# Altium PCB miaow-foc-board.pcbdoc (part 5 of 10)
Units mil, origin at the board's own origin, x right, y up, seen from the top; angles counter-clockwise.
Board outline 2755.91 x 3149.61 mil, 6 copper layers (SIG1, GND2, SIG3, PWR4, GND5, SIG6), stack 60.566 mil thick; 437 components, 392 nets, 2120 pads, 1697 vias.
Unrouted connection lines stored in the file: 1090.
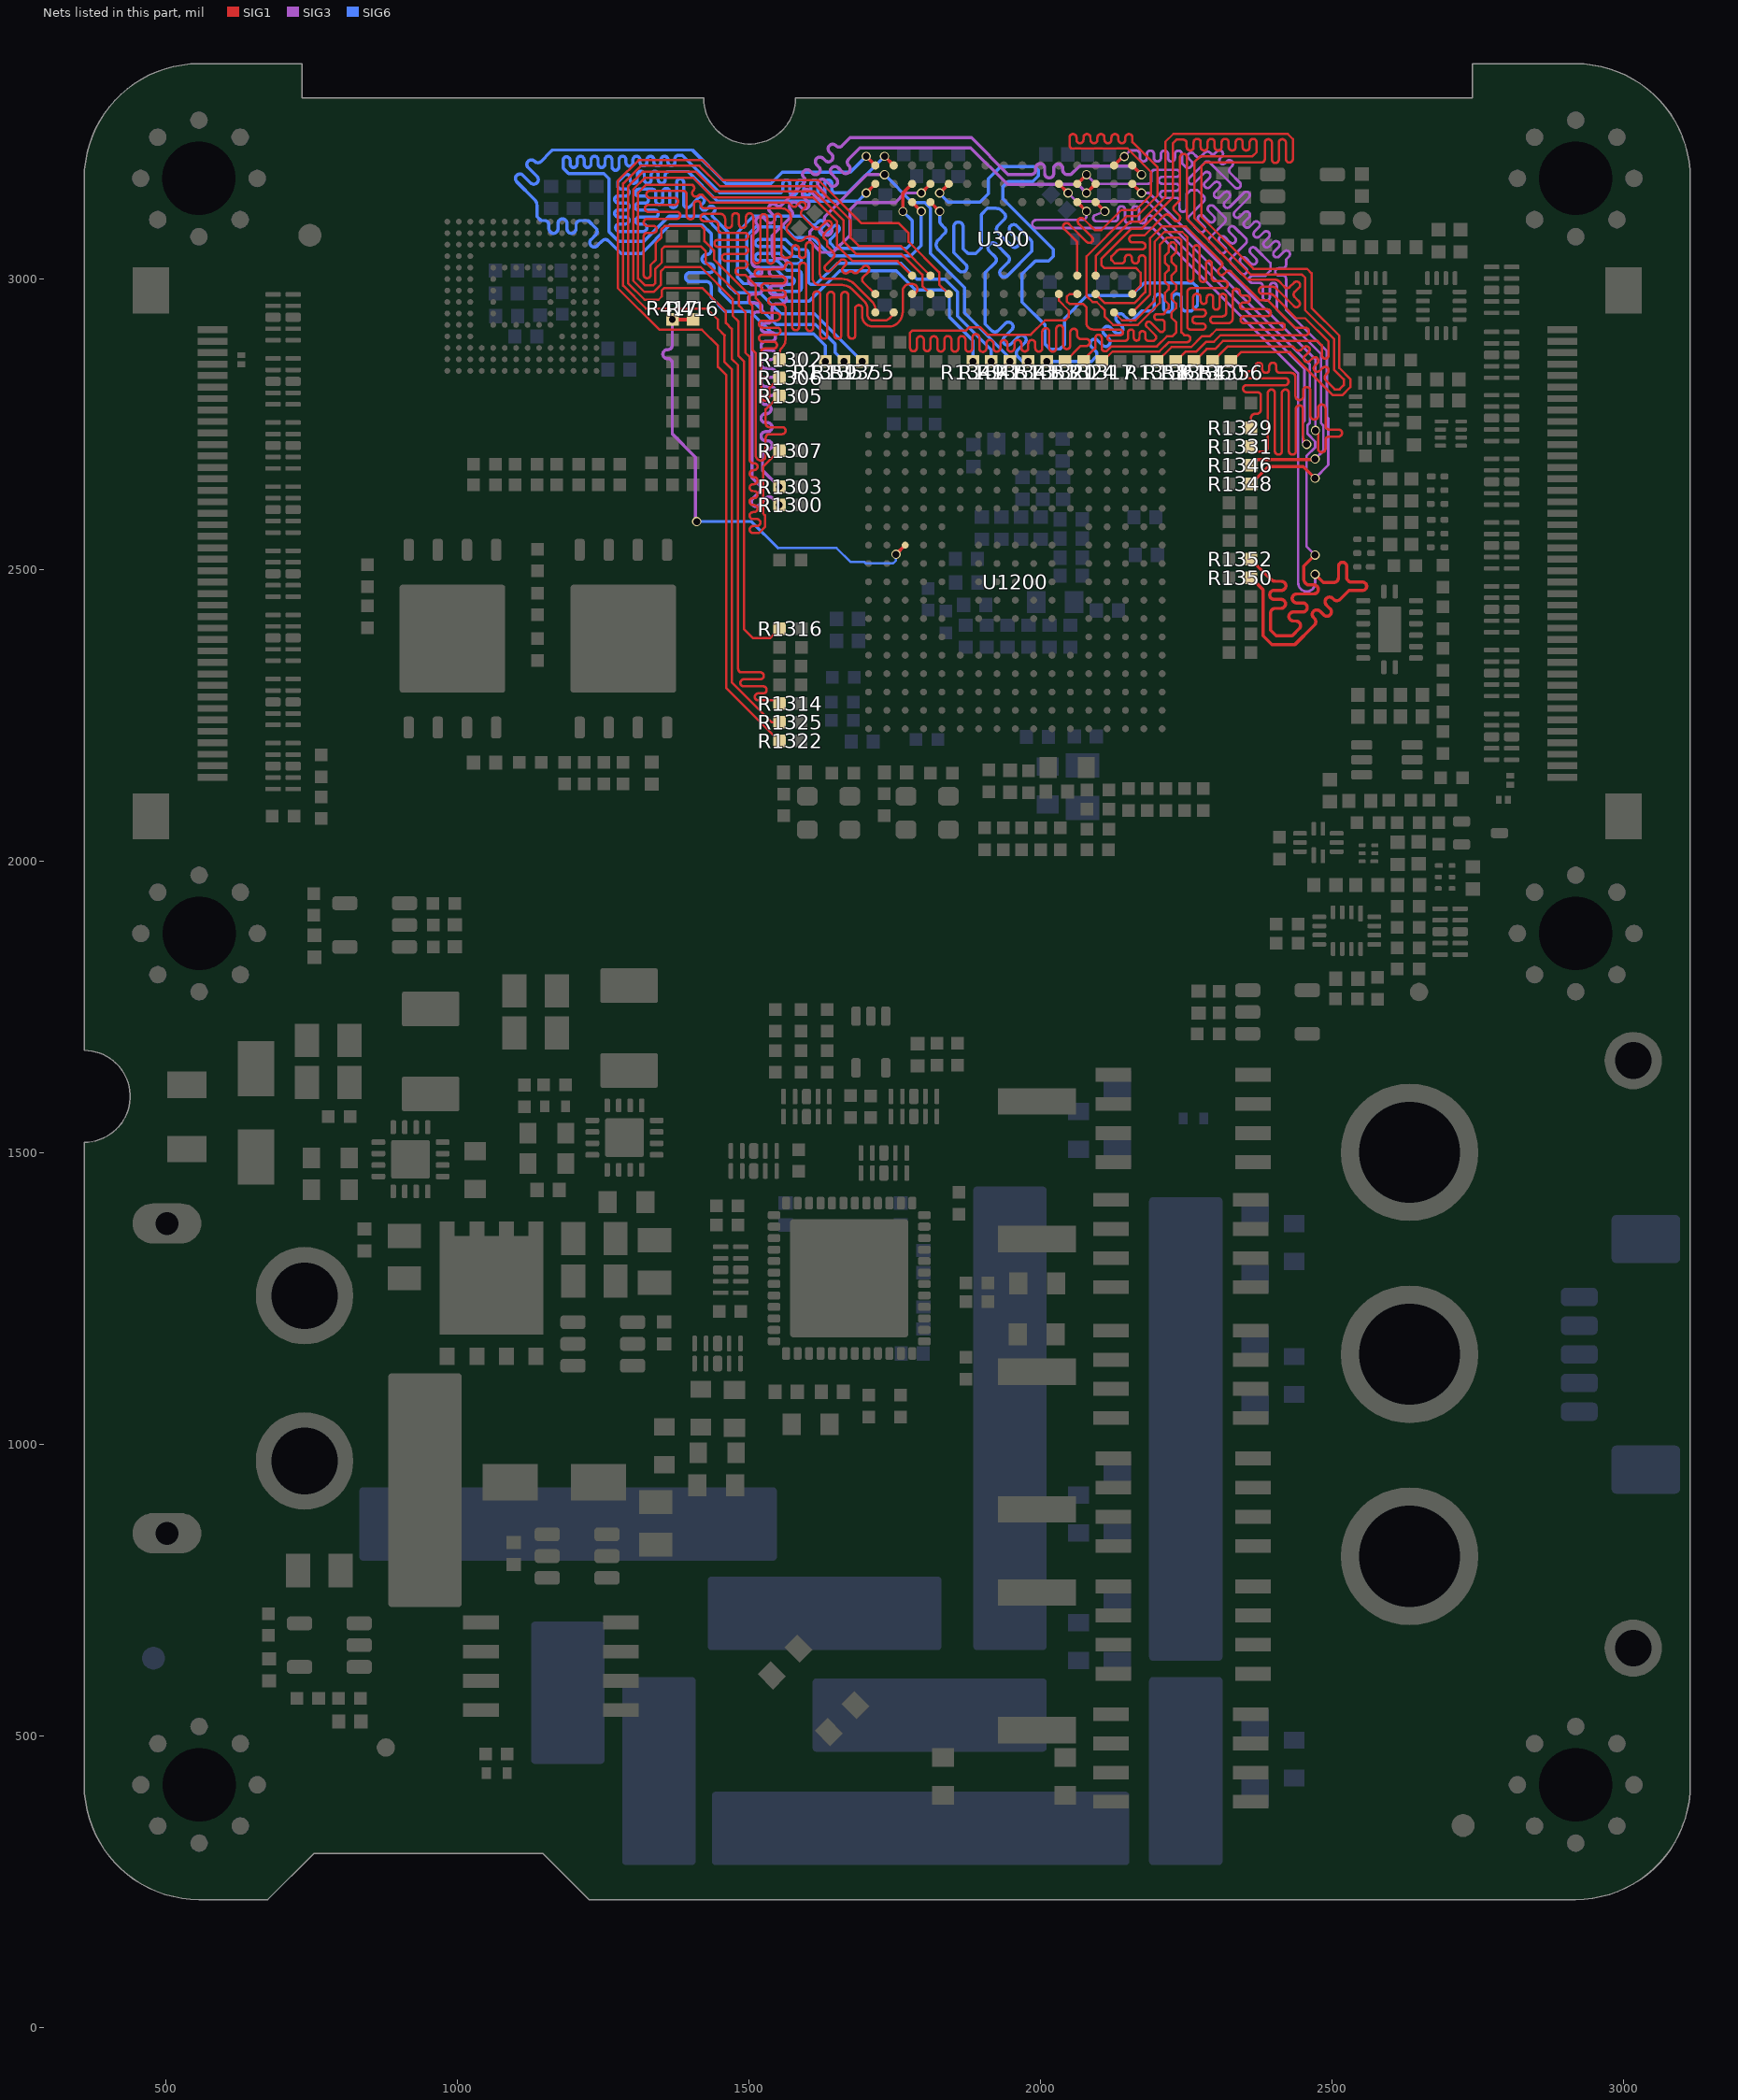
[diagram p8: the nets of this part, all layers, seen from the top]

## Via types
v1: diameter 17.72, hole 11.81, SIG1 to SIG6, tented both sides, 1223 vias
v2: diameter 15.75, hole 11.81, SIG1 to SIG6, tented both sides, 453 vias
v3: diameter 17.72, hole 11.81, SIG1 to SIG6, tented top, 21 vias

## Nets (pads, with @x,y where several pads share a name; then routed paths per layer and width w, separated by ;. In a path a pad name is that pad's centre, name@x,y a point inside that pad or via, vN(x,y) a via of type N, cw(c..) or ccw(c..) an arc to the next point about the centre after c; other vN are vias at no path point) (continued)
CMD: R416.2 R417.1 U1200.C11 | length 825.6
  SIG1 w6: v1(1368.5,2929.83) R416.2@1404.29,2929.83 ; v2(1752.34,2527.07) U1200.C11@1768.08,2542.81
  SIG3 w5.5: v1@1368.5,2929.64 1368.5,2916.66 1368.5,2886.07 cw(c1360.75,2886.07) 1360.75,2878.32 1360.03,2878.32 ccw(c1360.03,2870.57) 1360.03,2862.82 1360.75,2862.82 cw(c1360.75,2855.07) 1368.5,2855.07 1368.5,2852.32 1368.5,2733.73 1408.45,2693.77 1408.45,2585.05 v2(1410.34,2583.17)
  SIG6 w4: 1549.59,2538.13 1650.05,2538.13 1674.54,2513.64 1698.1,2513.64 1700.5,2511.24 1747.13,2511.24 1752.34,2516.45 v2(1752.34,2527.07)
  SIG6 w5: v2(1410.34,2583.17) 1504.55,2583.17 1549.59,2538.13
D0: R1329.2 U300.R8 | length 1320.9
  SIG1 w4: R1329.2@2361.46,2743.94 2361.46,2761.41 cw(c2368.1,2761.41) 2368.1,2768.06 2371.24,2768.06 ccw(c2371.24,2775.32) 2378.49,2775.32 2378.49,2799.18 ccw(c2372.49,2799.18) 2372.49,2805.18 2353.71,2805.18 cw(c2353.71,2811.18) 2353.71,2817.18 2420,2817.18 ccw(c2420,2823.18) 2420,2829.18 2358.32,2829.18 cw(c2358.32,2835.18) 2358.32,2841.18 2364.38,2841.18 ccw(c2364.38,2845.64) 2368.85,2845.64 2368.85,2849.88 cw(c2374.85,2849.88) 2380.85,2849.88 2380.85,2844.32 ccw(c2386.85,2844.32) 2392.85,2844.32 2392.85,2849.88 cw(c2398.85,2849.88) 2404.85,2849.88 2404.85,2844.32 ccw(c2410.85,2844.32) 2410.47,2838.33 ; 2410.48,2838.4 2430.01,2838.4 cw(c2430.01,2830.57) 2437.84,2830.57 2437.84,2798.4 ccw(c2444.53,2798.4) 2451.19,2797.77 2451.19,2809.35 cw(c2457.19,2808.12) 2463.31,2808.13 2463.31,2764.88 ccw(c2469.96,2764.88) 2476.62,2764.66 2476.62,2778.04 cw(c2482.92,2777.81) 2489.22,2777.83 2489.22,2747.09 ccw(c2495.22,2747.09) 2495.22,2741.09 2511.6,2741.09 cw(c2511.6,2735.09) 2511.6,2729.09 2495.22,2729.09 ccw(c2495.22,2723.09) 2489.22,2723.09 2489.22,2708.25 cw(c2482.92,2708.27) 2476.62,2708.04 2476.62,2734.92 v2(2472.03,2739.51)
  SIG1 w6: U300.R8@2157.85,3162.69 v2(2173.6,3146.94)
  SIG3 w4.5: v2(2173.6,3146.94) 2186.65,3146.94 2472.03,2861.56 2472.03,2743.32 2470.12,2741.41 v2(2472.03,2739.51)
D1: R1331.2 U300.N7 | length 1417.2
  SIG1 w4: R1331.2@2361.46,2711.82 2370.29,2702.99 2382.8,2702.99 ccw(c2382.8,2710.69) 2390.5,2710.69 2390.5,2803.68 cw(c2396.5,2803.68) 2402.5,2803.68 2402.5,2704.06 ccw(c2408.5,2704.06) 2414.5,2704.06 2414.5,2803.68 cw(c2420.5,2803.68) 2426.5,2803.68 2426.5,2704.06 ccw(c2432.5,2704.06) 2438.5,2704.06 2438.5,2776.68 cw(c2444.5,2776.68) 2450.5,2776.68 2450.5,2731.45 ccw(c2472.61,2731.45) v2(2456.98,2715.82)
  SIG1 w6: U300.N7@2094.86,3131.19 v2(2110.6,3115.44)
  SIG3 w4.5: v2(2110.6,3115.44) 2093.48,3108.79 ccw(c2096.11,3103.99) 2095.37,3098.57 2127.92,3098.57 ccw(c2128.03,3103.81) 2133.28,3103.81 2133.28,3118.19 cw(c2139.28,3118.19) 2145.28,3118.19 2145.28,3100.91 ccw(c2151.28,3100.91) 2157.28,3100.91 2157.28,3118.19 cw(c2163.28,3118.19) 2169.28,3118.19 2169.28,3100.91 ccw(c2175.28,3100.91) 2181.28,3100.91 2181.28,3102.49 cw(c2187.28,3102.49) 2191.52,3106.73 2453.04,2845.22 2453.04,2755.69 2450.28,2752.94 2450.28,2719.85 2454.7,2715.44 2457.98,2715.44 v2@2457.98,2715.82
D2: R1300.2 U300.R9 | length 1603.5
  SIG1 w6: U300.R9@2157.85,3194.18 v2(2173.6,3178.43)
  SIG3 w5.5: 1504.97,2658.33 1505.32,2658.33 ; v2(1552.04,2611.6) 1540.16,2623.48 ccw(c1534.68,2618) 1529.2,2623.48 1517.38,2611.66 cw(c1511.9,2617.14) 1506.42,2611.66 cw(c1511.9,2617.14) 1506.42,2622.62 1518.24,2634.44 ccw(c1512.76,2639.92) 1518.24,2645.4 1505.32,2658.33 ; v2(2173.6,3178.43) 2158.66,3193.37 2067.02,3193.37 2052.28,3178.62 2046.15,3178.62 cw(c2046.15,3186.37) 2038.4,3186.37 2038.4,3188.99 ccw(c2030.65,3188.99) 2022.9,3188.99 2022.9,3180.52 cw(c2015.15,3180.52) 2007.4,3180.52 2007.4,3189.49 ccw(c1999.65,3189.49) 1991.9,3189.49 1991.9,3186.37 cw(c1984.15,3186.37) 1984.15,3178.62 1944.73,3178.62 1881.66,3241.7 1673.72,3241.7 1660.14,3228.12 cw(c1654.66,3233.6) 1649.18,3228.12 1649.02,3228.27 ccw(c1643.54,3222.79) 1638.06,3228.27 ccw(c1643.54,3222.79) 1638.06,3217.31 1641.75,3213.62 cw(c1636.27,3208.14) 1641.75,3202.66 cw(c1636.27,3208.14) 1630.79,3202.66 1627.1,3206.35 ccw(c1621.62,3200.87) 1616.14,3206.35 ccw(c1621.62,3200.87) 1616.14,3195.39 1619.83,3191.7 cw(c1614.35,3186.22) 1619.83,3180.74 cw(c1614.35,3186.22) 1608.87,3180.74 1605.18,3184.43 ccw(c1599.7,3178.95) 1594.22,3184.43 ccw(c1599.7,3178.95) 1594.22,3173.47 cw(c1589.91,3168.91) 1594.35,3164.47 1555.76,3125.89 cw(c1551.33,3130.32) 1546.82,3125.97 ccw(c1541.34,3120.49) 1535.86,3125.97 ccw(c1541.34,3120.49) 1535.86,3115.01 1542.31,3108.57 cw(c1536.83,3103.09) 1542.31,3097.61 cw(c1536.83,3103.09) 1531.35,3097.61 1524.9,3104.05 ccw(c1519.42,3098.57) 1513.94,3104.05 ccw(c1519.42,3098.57) 1513.94,3093.09 1514.05,3092.99 cw(c1508.57,3087.51) 1514.05,3082.03 1505.3,3073.28 1505.3,3030.64 1505.3,3027.89 ccw(c1513.05,3027.89) 1513.05,3020.14 1514.58,3020.14 cw(c1514.58,3012.39) 1514.58,3004.64 1506.82,3004.64 ccw(c1506.82,2996.89) 1506.82,2989.14 1514.58,2989.14 cw(c1514.58,2981.39) 1514.58,2973.64 1506.82,2973.64 ccw(c1506.82,2965.89) 1506.82,2958.14 1514.58,2958.14 cw(c1514.58,2950.39) 1514.58,2942.64 1513.05,2942.64 ccw(c1513.05,2934.89) 1505.3,2934.89 1505.3,2875.23 1505.3,2658.35
D3: R1303.2 U300.N8 | length 1612.4
  SIG1 w6: v2(2079.11,3146.94) U300.N8@2094.86,3162.69
  SIG3 w5.5: 1539.57,2930.42 cw(c1531.85,2931.15) 1531.85,2923.4 1528.46,2923.4 ccw(c1528.46,2915.65) 1528.46,2907.9 1537.78,2907.9 cw(c1537.78,2900.15) 1537.78,2892.4 1528.46,2892.4 ccw(c1528.46,2884.65) 1528.46,2876.9 1537.78,2876.9 cw(c1537.78,2869.15) 1537.78,2861.4 1528.46,2861.4 ccw(c1528.46,2853.65) 1528.46,2845.9 1537.78,2845.9 cw(c1537.78,2838.15) 1537.78,2830.4 1528.46,2830.4 ccw(c1528.46,2822.65) 1528.46,2814.9 1537.78,2814.9 cw(c1537.78,2807.15) 1537.78,2799.4 1528.46,2799.4 ccw(c1528.46,2791.65) 1528.46,2783.9 1530.17,2783.9 cw(c1530.17,2776.15) 1530.17,2768.4 1528.46,2768.4 ccw(c1528.46,2760.65) 1528.46,2752.9 1531.85,2752.9 cw(c1531.85,2745.15) 1531.85,2737.4 1528.46,2737.4 ccw(c1528.46,2729.65) 1528.46,2721.9 1531.85,2721.9 cw(c1531.85,2714.15) 1531.85,2706.4 1530.92,2706.4 ccw(c1530.92,2698.65) 1523.17,2698.65 1523.17,2671.5 v2@1551.92,2642.75 ; 1539.9,2930.39 1539.9,2949.26 cw(c1547.65,2949.26) 1547.65,2957.01 1556.4,2957.01 ccw(c1556.4,2964.76) 1556.4,2972.51 1542.65,2972.51 cw(c1542.65,2980.26) 1542.65,2988.01 1556.4,2988.01 ccw(c1556.4,2995.76) 1556.4,3003.51 1542.65,3003.51 cw(c1542.65,3011.26) 1542.65,3019.01 1556.4,3019.01 ccw(c1556.4,3026.76) 1556.4,3034.51 1547.65,3034.51 cw(c1547.65,3042.26) 1539.9,3042.26 1539.9,3073.8 1548.61,3082.51 1572.47,3106.37 ccw(c1566.99,3111.85) 1572.47,3117.33 1571.68,3118.12 cw(c1577.16,3123.6) 1571.68,3129.08 cw(c1577.16,3123.6) 1582.64,3129.08 1589.85,3121.87 ccw(c1595.33,3127.35) 1600.82,3121.87 ccw(c1595.33,3127.35) 1600.82,3132.83 1593.6,3140.04 cw(c1599.08,3145.52) 1593.6,3151 cw(c1599.08,3145.52) 1604.56,3151 1616.84,3138.73 ccw(c1622.32,3144.21) 1627.8,3138.73 ccw(c1622.32,3144.21) 1627.8,3149.69 1620.13,3157.35 cw(c1625.61,3162.83) 1620.13,3168.31 cw(c1625.61,3162.83) 1631.09,3168.31 1638.76,3160.65 ccw(c1644.24,3166.13) 1649.72,3160.65 ccw(c1644.24,3166.13) 1649.72,3171.61 1642.05,3179.27 cw(c1647.53,3184.75) 1642.05,3190.24 cw(c1647.53,3184.76) 1653.01,3190.24 1660.68,3182.57 ccw(c1666.16,3188.05) 1671.64,3182.57 ccw(c1666.16,3188.05) 1671.64,3193.53 1671.11,3194.05 cw(c1676.59,3199.53) 1671.11,3205.01 1682.89,3216.79 1690.52,3224.42 1880.59,3224.42 1943.39,3161.62 2064.43,3161.62 v2(2079.11,3146.94)
  other v2: 1552.04,2642.75
D4: R1346.2 U300.M8 | length 1748.5
  SIG1 w5.5: R1346.2@2361.46,2679.69 2371.19,2689.42 2470.24,2689.42 v2(2471.38,2690.56)
  SIG1 w6: U300.M8@2063.36,3162.69 v2(2079.11,3178.43)
  SIG3 w4.5: v2(2079.11,3178.43) 2094.86,3162.69 2184.41,3162.69 ccw(c2184.41,3168.69) 2190.41,3168.69 2190.41,3180.69 cw(c2196.41,3180.69) 2196.41,3186.69 2233.39,3186.69 cw(c2233.39,3180.69) 2233.39,3174.69 2209.21,3174.69 ccw(c2209.21,3168.69) 2209.21,3162.69 2232.78,3162.69 cw(c2232.78,3156.69) 2232.78,3150.69 2211.51,3150.69 ccw(c2211.51,3144.69) 2205.51,3144.69 ccw(c2211.51,3144.69) 2211.51,3138.69 2232.78,3138.69 cw(c2232.78,3132.69) 2238.78,3132.69 2238.78,3120.69 ccw(c2244.78,3120.69) 2250.78,3120.69 2250.78,3144.93 2257.85,3152.01 2269.45,3152.01 2280.38,3141.08 cw(c2276.13,3136.84) 2280.4,3132.62 2254.9,3107.12 ccw(c2259.16,3102.9) 2254.89,3098.69 2272.3,3081.28 ccw(c2276.54,3085.52) 2280.78,3081.28 ccw(c2276.54,3085.52) 2280.78,3089.77 2271.89,3098.66 cw(c2276.13,3102.9) 2271.89,3107.14 cw(c2276.13,3102.9) 2280.38,3107.14 2289.27,3098.25 ccw(c2293.51,3102.5) 2297.75,3098.25 ccw(c2293.51,3102.5) 2297.75,3106.74 2288.84,3115.65 cw(c2293.1,3119.87) 2297.33,3124.13 2316.42,3105.04 cw(c2312.17,3100.8) 2316.43,3096.58 2290.94,3071.09 ccw(c2295.2,3066.86) 2290.93,3062.65 2308.33,3045.25 ccw(c2312.58,3049.49) 2316.82,3045.25 ccw(c2312.58,3049.49) 2316.82,3053.73 2307.93,3062.62 cw(c2312.17,3066.86) 2307.93,3071.11 cw(c2312.17,3066.86) 2316.41,3071.11 2325.3,3062.22 ccw(c2329.55,3066.46) 2333.79,3062.22 ccw(c2329.55,3066.46) 2333.79,3070.7 2324.88,3079.61 cw(c2329.14,3083.83) 2333.37,3088.09 2352.46,3069 cw(c2348.21,3064.77) 2352.47,3060.54 2326.98,3035.05 ccw(c2331.24,3030.83) 2326.97,3026.61 2344.37,3009.21 ccw(c2348.61,3013.45) 2352.85,3009.21 ccw(c2348.61,3013.45) 2352.85,3017.69 2343.97,3026.58 cw(c2348.21,3030.83) 2343.97,3035.07 cw(c2348.21,3030.83) 2352.45,3035.07 2361.34,3026.18 ccw(c2365.58,3030.42) 2369.83,3026.18 ccw(c2365.58,3030.42) 2369.83,3034.67 2360.92,3043.57 cw(c2365.18,3047.8) 2369.41,3052.06 2394.9,3026.56 2394.9,3013.63 2385.91,3004.64 2363.79,3004.64 ccw(c2363.79,2998.64) 2363.79,2992.64 2375.79,2992.64 cw(c2375.79,2986.64) 2381.79,2986.64 2381.79,2968.4 ccw(c2387.79,2968.4) 2387.79,2962.4 ccw(c2387.79,2968.4) 2393.79,2968.4 2393.79,2986.64 cw(c2399.79,2986.64) 2399.79,2992.64 cw(c2399.79,2986.64) 2405.79,2986.64 2405.79,2946.52 2481.71,2870.6 2481.71,2752 2485.7,2748.01 2485.7,2704.89 v2(2471.38,2690.56)
D5: R1348.2 U300.P9 | length 1713.4
  SIG1 w4: v2@2141.75,3209.58 v2(2144.19,3209.58)
  SIG1 w5.5: R1348.2@2361.46,2647.95 2391.18,2677.68 2451.32,2677.68 v2(2471.38,2657.62)
  SIG1 w6: U300.P9@2126.35,3194.18 v2@2141.75,3209.58
  SIG3 w4.5: v2(2144.19,3209.58) 2154.28,3219.68 2164.78,3219.68 2164.88,3219.58 cw(c2164.88,3213.58) 2170.88,3213.58 2170.88,3207.13 ccw(c2176.88,3207.13) 2182.88,3207.13 2182.88,3213.67 cw(c2188.88,3213.67) 2194.88,3213.67 2194.88,3207.13 ccw(c2200.88,3207.13) 2206.88,3207.13 2206.88,3213.58 cw(c2212.88,3213.58) 2218.88,3213.58 2218.88,3207.04 ccw(c2224.88,3207.04) 2230.88,3207.04 2230.88,3213.49 cw(c2236.88,3213.49) 2242.88,3213.49 2242.88,3197.89 2249.22,3191.55 ccw(c2253.46,3195.8) 2257.7,3191.55 2259.11,3192.97 ccw(c2254.87,3197.21) 2259.11,3201.45 2254.56,3206 cw(c2258.81,3210.24) 2263.05,3214.49 2267.6,3209.94 ccw(c2271.84,3214.18) 2276.09,3209.94 2282.39,3216.24 cw(c2286.66,3212.02) 2291.5,3215.57 ; 2291.75,3215.41 ccw(c2295.99,3219.65) 2300.23,3215.41 2303.17,3218.35 cw(c2307.42,3214.11) 2311.66,3209.86 2308.72,3206.93 ccw(c2312.96,3202.68) 2308.72,3198.44 ccw(c2312.96,3202.68) 2317.2,3198.44 2320.14,3201.38 cw(c2324.39,3197.14) 2328.63,3192.89 2325.69,3189.96 ccw(c2329.93,3185.71) 2325.69,3181.47 2342.1,3165.06 cw(c2337.85,3160.82) 2333.61,3156.58 2290.89,3199.3 ccw(c2286.65,3195.06) 2282.41,3199.3 2255.29,3172.17 ccw(c2259.56,3167.95) 2263.78,3163.69 2281.42,3181.33 cw(c2285.66,3177.09) 2289.91,3181.33 cw(c2285.66,3177.09) 2289.91,3172.85 2282.73,3165.67 ccw(c2286.98,3161.43) 2282.73,3157.19 ccw(c2286.98,3161.43) 2291.22,3157.19 2298.39,3164.36 cw(c2302.63,3160.12) 2306.88,3164.36 cw(c2302.63,3160.12) 2306.88,3155.88 2299.7,3148.7 ccw(c2303.95,3144.46) 2299.7,3140.22 ccw(c2303.95,3144.46) 2308.19,3140.22 2315.36,3147.39 cw(c2319.6,3143.15) 2323.85,3147.39 cw(c2319.6,3143.15) 2323.85,3138.9 2316.67,3131.73 ccw(c2320.92,3127.49) 2316.67,3123.25 ccw(c2320.92,3127.49) 2325.16,3123.25 2349.24,3147.32 cw(c2353.5,3143.1) 2357.72,3138.84 2333.65,3114.76 ccw(c2337.89,3110.52) 2333.65,3106.28 ccw(c2337.89,3110.52) 2342.13,3106.28 2349.3,3113.45 cw(c2353.55,3109.21) 2357.79,3113.45 cw(c2353.55,3109.21) 2357.79,3104.96 2350.62,3097.79 ccw(c2354.86,3093.55) 2350.62,3089.31 ccw(c2354.86,3093.55) 2359.1,3089.31 2366.27,3096.48 cw(c2370.52,3092.24) 2374.76,3096.48 cw(c2370.52,3092.24) 2374.76,3087.99 2367.59,3080.82 ccw(c2371.83,3076.58) 2367.59,3072.34 ccw(c2371.83,3076.58) 2376.07,3072.34 2383.24,3079.51 cw(c2387.49,3075.27) 2391.73,3079.51 cw(c2387.49,3075.27) 2391.73,3071.02 2384.56,3063.85 ccw(c2388.8,3059.61) 2384.56,3055.37 ccw(c2388.8,3059.61) 2393.04,3055.37 2400.21,3062.54 cw(c2404.46,3058.29) 2408.7,3062.54 cw(c2404.46,3058.29) 2408.7,3054.05 2401.53,3046.88 ccw(c2405.77,3042.64) 2401.53,3038.39 ccw(c2405.77,3042.64) 2410.01,3038.39 2418.02,3046.4 cw(c2422.26,3042.16) 2426.5,3037.91 2421.62,3033.04 2421.62,3023.69 cw(c2415.62,3023.69) 2415.62,3017.69 2408.97,3017.69 ccw(c2408.97,3011.69) 2408.97,3005.69 2415.62,3005.69 cw(c2415.62,2999.69) 2421.62,2999.69 2421.62,2945.95 2491.53,2876.04 2491.53,2762.64 2493.99,2760.18 2493.99,2680.24 v2(2471.38,2657.62)
D6: R1350.2 U300.M7 | length 1662
  SIG1 w5.5: R1350.2@2361.46,2486.93 2382.06,2466.33 2382.06,2387.23 2397.5,2371.78 2435.83,2371.78 2436.31,2371.77 2468.48,2403.94 2470.43,2405.88 ccw(c2464.95,2411.36) 2470.43,2416.84 2468.78,2418.49 cw(c2474.26,2423.97) 2468.78,2429.45 cw(c2474.26,2423.97) 2479.74,2429.45 2486.11,2423.08 ccw(c2491.61,2428.54) 2497.07,2434.04 2490.7,2440.41 cw(c2496.18,2445.89) 2490.7,2451.37 cw(c2496.18,2445.89) 2501.66,2451.37 2503.31,2449.72 ccw(c2508.79,2455.2) 2514.27,2449.72 2523,2458.46 2529.63,2465.09 2552.78,2465.09 ccw(c2552.78,2472.23) 2553.95,2479.28 2534.19,2479.28 cw(c2534.19,2487.96) 2525.5,2487.96 2525.5,2506.56 ccw(c2518.59,2506.52) 2511.68,2506.56 2511.68,2486.98 cw(c2503.39,2486.98) 2503.39,2478.7 2485.41,2478.7 v2(2471.38,2492.73)
  SIG1 w6: U300.M7@2063.36,3131.19 v2(2079.11,3115.44)
  SIG3 w4.5: v2(2079.11,3115.44) 2079.11,3107.48 cw(c2072.33,3107.48) 2072.33,3100.71 1992.97,3100.71 ccw(c1992.97,3093.77) 1986.6,3091.04 1990.24,3087.39 ccw(c1992.97,3093.77) 1992.81,3086.84 2192.91,3086.84 2442.25,2837.49 2442.25,2505.55 ; 2442.29,2505.55 2442.29,2478.28 ccw(c2457.22,2478.28) 2457.22,2463.35 ccw(c2457.22,2477.51) 2471.38,2477.51 v2(2471.38,2492.73)
D7: R1352.2 U300.L8 | length 1427.7
  SIG1 w5.5: R1352.2@2360.45,2519.06 2394.84,2484.67 ccw(c2404.17,2494.05) 2394.89,2484.62 ccw(c2404.19,2494.03) 2404.19,2480.8 2413.55,2480.8 cw(c2413.55,2473.05) 2413.55,2465.3 2401.28,2465.3 ccw(c2401.28,2457.55) 2401.28,2449.8 2412.83,2449.8 cw(c2412.83,2442.05) 2412.83,2434.3 2402.82,2434.3 ccw(c2402.82,2426.55) 2395.07,2426.55 2395.07,2397.14 2404.6,2387.62 2432.33,2387.62 2444.1,2399.39 ccw(c2438.62,2404.87) 2438.62,2412.62 2434.24,2412.62 cw(c2434.24,2420.37) 2434.24,2428.12 2450.21,2428.12 ccw(c2450.21,2435.87) 2450.21,2443.62 2439.95,2443.62 cw(c2439.95,2451.37) 2439.95,2459.12 2469.19,2459.12 ccw(c2469.19,2466.87) 2469.19,2474.62 2461.51,2474.62 cw(c2461.51,2483.86) 2452.27,2483.86 2452.27,2506.75 v2(2471.38,2525.86)
  SIG1 w6: U300.L8@2031.86,3162.69 v2(2047.61,3146.94)
  SIG3 w4.5: v2(2047.61,3146.94) 2061.79,3132.76 2182.68,3132.76 2462.42,2853.02 2462.42,2752.52 2458.31,2748.41 2458.31,2733.82 2471.46,2720.67 2471.46,2710.39 2456.63,2695.55 2456.63,2540.61 v2(2471.38,2525.86)
D8: R1354.2 U300.N2 | length 1540.4
  SIG1 w4: U300.N2@2094.86,2973.71 2110.6,2957.96 2161.06,2957.96 2179.94,2976.84 2179.94,3034.71 ccw(c2174.58,3034.65) 2169.22,3034.65 2169.22,3032.04 cw(c2163.22,3032.04) 2157.22,3032.04 2157.22,3034.81 ccw(c2151.11,3034.81) 2144.99,3034.81 2144.99,3032.1 cw(c2139.23,3032.04) 2139.89,3026.32 2127.63,3026.32 2121.87,3032.08 2121.87,3038.13 2130.79,3047.05 cw(c2137.56,3041.2) 2137.56,3050.15 2174.42,3050.15 ccw(c2174.42,3056.15) 2174.42,3062.15 2158.43,3062.15 cw(c2158.43,3068.15) 2158.43,3074.15 2178.5,3074.15 2212.67,3108.32 cw(c2217.07,3103.93) 2221.46,3108.32 2229.7,3100.08 ccw(c2233.94,3104.33) 2238.18,3108.57 2229.94,3116.81 cw(c2234.19,3121.05) 2229.94,3125.29 2239.67,3135.02 2239.67,3208.12 cw(c2245.67,3208.12) 2251.67,3208.12 2251.67,3102.32 2356.13,2997.86 2404.51,2997.86 cw(c2404.51,2991.86) 2408.74,2996.12 2417.9,2986.96 2419.32,2985.55 ccw(c2423.56,2989.79) 2427.8,2985.55 2435.52,2993.26 cw(c2439.76,2989.02) 2444,2984.78 2436.29,2977.06 ccw(c2440.53,2972.82) 2436.29,2968.57 2443.02,2961.85 2443.56,2961.3 cw(c2439.32,2957.06) 2435.07,2952.82 2403.77,2984.12 ccw(c2399.54,2979.86) 2399.54,2985.86 2380.97,2985.86 ccw(c2380.97,2979.86) 2380.97,2973.86 2394.57,2973.86 cw(c2394.57,2967.39) 2399.13,2971.99 2439.02,2932.1 2454.38,2932.1 2494.5,2891.99 2494.5,2868.71 cw(c2488.76,2868.71) 2483.02,2868.71 2483.02,2885.66 2475.69,2892.98 2372.94,2892.98 2313.3,2892.98 2299.71,2879.39 2285.47,2879.39 R1354.2@2263.73,2857.65
D9: R1356.2 U300.N3 | length 1643.2
  SIG1 w4: U300.N3@2094.86,3005.21 2094.86,3039.05 2153.18,3097.38 2172.11,3097.38 2214.55,3139.82 2214.55,3234.68 2228.25,3248.37 2424.35,3248.37 2433.18,3239.54 2433.18,3205.34 cw(c2427.18,3205.34) 2421.18,3205.34 2421.18,3233.26 ccw(c2415.18,3233.26) 2409.18,3233.26 2409.18,3204.38 cw(c2403.18,3204.38) 2397.18,3204.38 2397.18,3233.26 ccw(c2391.18,3233.26) 2385.18,3233.26 2385.18,3205.34 cw(c2379.18,3205.34) 2379.18,3199.34 2282.74,3199.34 2276.01,3192.6 2276.01,3106.52 2365.69,3016.84 2457.56,3016.84 2465.2,3009.2 2465.2,2950.02 2512.91,2902.31 2512.91,2846.91 2531.94,2827.87 2531.94,2813.84 2518.05,2799.95 2502.17,2799.95 2428.44,2873.67 2344.38,2873.67 2328.36,2857.65 R1356.2@2326.97,2857.65
D10: R1358.2 U300.P1 | length 1655.6
  SIG1 w4: U300.P1@2126.35,2942.21 2140.07,2928.49 2162.96,2928.49 2196,2961.54 2196,3063.22 2212.76,3079.98 2243.51,3079.98 2252.1,3071.39 2252.1,3000.43 ccw(c2257.5,3000.43) 2262.9,3000.43 2262.9,3052.06 cw(c2268.09,3052.05) 2273.28,3051.98 2273.28,3000.05 ccw(c2279,3000.05) 2284.71,3000.05 2284.71,3026.09 cw(c2289.39,3026.09) 2294.07,3026.09 2294.07,3001.56 ccw(c2300.07,3001.56) 2300.07,2995.56 2315.66,2995.56 cw(c2315.66,2989.56) 2315.66,2983.56 2259,2983.56 ccw(c2259,2976.56) 2252.01,2976.56 2252.01,2918.49 ccw(c2258.24,2918.49) 2258.24,2912.26 2278.05,2912.26 ccw(c2278.03,2917.74) 2278.05,2923.22 2266.73,2923.22 cw(c2266.76,2929.17) 2266.73,2935.12 2278.05,2935.12 ccw(c2278.05,2941.12) 2278.05,2947.12 2265.54,2947.12 cw(c2265.54,2950.59) 2262.07,2950.59 2262.07,2967.56 cw(c2268.51,2967.56) 2274.95,2967.56 2274.95,2962.09 ccw(c2280.24,2962.09) 2285.54,2962.09 2285.54,2967.26 cw(c2291.05,2967.26) 2296.55,2967.26 2296.55,2952.21 ccw(c2301.95,2952.21) 2307.35,2952.21 2307.35,2968.1 cw(c2313.17,2968.1) 2318.99,2968.1 2318.99,2942.12 cw(c2312.1,2942.12) 2312.1,2935.24 2297.45,2935.24 ccw(c2297.45,2929.34) 2297.45,2923.45 2321.72,2923.45 ccw(c2321.72,2931.8) 2330.07,2931.8 2330.07,2976.75 cw(c2336.07,2976.75) 2342.07,2976.75 ccw(c2348.04,2976.72) 2348.04,2970.72 2353.57,2970.72 cw(c2353.57,2964.72) 2353.57,2958.72 2348.04,2958.72 ccw(c2348.07,2953.07) 2348.04,2947.43 2389.48,2947.43 cw(c2389.44,2941.45) 2389.48,2935.47 2349.37,2935.47 ccw(c2349.35,2929.6) 2349.37,2923.74 2413.81,2923.74 cw(c2413.78,2918.1) 2413.81,2912.45 2302.02,2912.45 2290.56,2901 2277,2901 2258.83,2882.83 2225.19,2882.83 R1358.2@2200.49,2858.13
D11: R1360.2 U300.R2 | length 1704.6
  SIG1 w4: U300.R2@2157.85,2973.71 2171.91,2987.77 2171.91,3010.23 2163.74,3018.4 2109.48,3018.4 2104.43,3023.45 2104.43,3033.63 2156.57,3085.77 2174.46,3085.77 2227.34,3138.65 2227.34,3232 2233.79,3238.45 2245.09,3238.45 cw(c2245.09,3232.45) 2251.09,3232.45 2251.09,3225.88 ccw(c2257.09,3225.88) 2263.09,3225.88 2263.09,3233.94 cw(c2269.09,3233.94) 2275.09,3233.94 2275.09,3225.88 ccw(c2281.09,3225.88) 2287.09,3225.88 2287.09,3233.94 cw(c2293.09,3233.94) 2299.09,3233.94 2299.09,3225.88 ccw(c2305.09,3225.88) 2311.09,3225.88 2311.09,3233.94 cw(c2317.09,3233.94) 2323.09,3233.94 2323.09,3225.88 ccw(c2329.09,3225.88) 2335.09,3225.88 2335.09,3233.94 cw(c2341.09,3233.94) 2347.09,3233.94 2347.09,3225.88 ccw(c2353.09,3225.88) 2359.09,3225.88 2359.09,3233.67 cw(c2365.09,3233.67) 2371.09,3233.67 2371.09,3217.12 2363.63,3209.66 2274.25,3209.66 2264.19,3199.6 2264.19,3104.07 2361.29,3006.98 2448.85,3006.98 2454.29,3001.54 2454.29,2946.02 2503.65,2896.66 2503.65,2844.12 2520.61,2827.17 2520.61,2817.21 2513.58,2810.18 2505.02,2810.18 2490.03,2825.17 cw(c2495.23,2830.37) 2490.03,2835.58 2492.97,2838.52 ccw(c2488.73,2842.76) 2484.49,2847 2479.34,2841.86 cw(c2475.1,2846.1) 2470.86,2841.86 cw(c2475.1,2846.1) 2470.86,2850.34 2475.46,2854.95 ccw(c2471.22,2859.19) 2466.98,2863.43 2462.37,2858.83 cw(c2458.13,2863.07) 2453.89,2858.83 cw(c2458.13,2863.07) 2453.89,2867.32 2460.33,2873.75 ccw(c2456.1,2878.01) 2451.84,2882.24 2447.61,2878 cw(c2443.36,2882.25) 2439.12,2878 2434.6,2882.52 2433.19,2883.94 2321.64,2883.94 R1360.2@2295.35,2857.65
D12: R1361.2 U300.R1 | length 772.6
  SIG1 w4: U300.R1@2157.85,2942.21 2188.31,2972.67 2188.31,3069.54 2208.3,3089.53 2249.96,3089.53 2310.62,3028.87 cw(c2306.38,3024.63) 2310.62,3020.38 2306.72,3016.48 ccw(c2310.96,3012.24) 2315.2,3007.99 2319.11,3011.9 cw(c2323.35,3007.66) 2327.59,3011.9 2376.28,2963.17 2389.87,2963.17 2437.29,2915.75 2454.61,2915.75 cw(c2454.61,2909.3) 2454.61,2902.85 2372.94,2902.85 2308.97,2902.85 2297.97,2891.84 2284.57,2891.84 2267.76,2875.03 2249.19,2875.03 R1361.2@2232.11,2857.96
D13: R1317.2 U300.M3 | length 1789.9
  SIG1 w4: U300.M3@2063.36,3005.21 2063.36,3062.52 2040.77,3085.11 cw(c2045.02,3089.35) 2049.26,3093.59 2079.81,3063.04 ccw(c2084.05,3067.29) 2088.3,3071.53 2065.88,3093.94 cw(c2070.12,3098.19) 2074.36,3102.43 2093.44,3083.36 2104.74,3083.36 2139.06,3117.68 2163.77,3117.68 2189.78,3143.68 2189.78,3183.03 2149.31,3223.5 2055.34,3223.5 cw(c2055.34,3228.88) 2049.96,3228.88 2049.96,3242.09 cw(c2055.96,3242.09) 2061.96,3242.09 2061.96,3238.54 ccw(c2067.96,3238.54) 2073.96,3238.54 2073.96,3242.09 cw(c2079.96,3242.09) 2085.96,3242.09 2085.96,3238.54 ccw(c2091.96,3238.54) 2097.96,3238.54 2097.96,3242.09 cw(c2103.96,3242.09) 2109.96,3242.09 2109.96,3238.54 ccw(c2115.96,3238.54) 2121.96,3238.54 2121.96,3242.09 cw(c2127.96,3242.09) 2133.96,3242.09 2133.96,3238.54 ccw(c2139.96,3238.54) 2145.96,3238.54 2145.96,3242.09 cw(c2151.96,3242.09) 2157.96,3242.09 2157.96,3234.05 2201.23,3190.78 2201.23,3142.48 2165.67,3106.92 2147.91,3106.92 2079.35,3038.36 2079.35,2970 2089.66,2959.7 2096.83,2959.7 2110.22,2946.3 2110.22,2935.43 2125.13,2920.52 2167.12,2920.52 2204.71,2958.11 2204.71,3058.18 2216.8,3070.27 2238.17,3070.27 2242.13,3066.31 2242.13,2908.62 2242.13,2908.04 2247.04,2903.13 2251.27,2903.13 cw(c2251.27,2897.13) 2251.27,2891.13 2220.4,2891.13 2204.05,2874.79 2123.68,2874.79 2106.86,2857.96 R1317.2@2105.62,2857.96
D14: R1320.2 U300.L2 | length 1262.4
  SIG1 w4: U300.L2@2031.86,2973.71 2031.86,2962.25 2048.75,2945.36 2048.75,2934.23 2042.66,2928.14 2007.86,2928.14 1983.49,2903.78 1909.55,2903.78 1896.53,2916.8 1878.54,2916.8 1872.21,2910.47 1779.71,2910.47 1776.44,2907.19 1776.44,2881.22 ccw(c1782.23,2881.18) 1788.02,2881.22 1788.02,2894.99 cw(c1793.99,2894.99) 1799.96,2894.99 1799.96,2881.42 ccw(c1805.65,2881.4) 1811.33,2881.42 1811.33,2895.17 cw(c1817.33,2895.17) 1823.33,2895.17 1823.33,2880.88 ccw(c1829.33,2880.88) 1835.33,2880.88 1835.33,2895.36 cw(c1841.33,2895.36) 1847.33,2895.36 1847.33,2880.61 ccw(c1853.33,2880.61) 1852.19,2874.72 1854.47,2874.72 ccw(c1853.33,2880.61) 1859.33,2880.61 1859.33,2895.45 cw(c1865.33,2895.45) 1871.33,2895.45 1871.33,2880.61 ccw(c1877.33,2880.61) 1876.18,2874.72 1878.48,2874.72 ccw(c1877.33,2880.61) 1883.33,2880.61 1883.33,2898.89 cw(c1889.33,2898.89) 1895.33,2898.89 1895.33,2880.33 ccw(c1901.33,2880.33) 1907.33,2880.33 1907.33,2888.8 cw(c1913.33,2888.8) 1919.33,2888.8 1919.33,2880.76 ccw(c1925.33,2880.76) 1931.33,2880.76 1931.33,2888.61 cw(c1937.33,2888.61) 1943.33,2888.61 1943.33,2880.9 ccw(c1949.33,2880.9) 1955.33,2880.9 1955.33,2888.61 cw(c1961.33,2888.61) 1967.33,2888.61 1967.33,2881.04 ccw(c1973.33,2881.04) 1979.33,2881.04 1979.33,2888.61 cw(c1985.33,2888.61) 1991.33,2888.61 1991.33,2880.88 ccw(c1997.33,2880.88) 2003.33,2880.88 2003.33,2908.99 cw(c2009.33,2908.99) 2015.33,2908.99 2015.33,2880.88 ccw(c2021.33,2880.88) 2027.33,2880.88 2027.33,2913.83 cw(c2033.33,2913.83) 2039.33,2913.83 2039.33,2885.16 ccw(c2045.33,2885.16) 2051.33,2885.16 2051.33,2907.86 cw(c2057.33,2907.86) 2063.33,2907.86 2063.33,2902.22 2063.26,2902.16 ccw(c2069.25,2902.54) 2069.25,2896.54 2078.78,2896.54 cw(c2078.78,2890.54) 2078.78,2884.54 2068.95,2884.54 R1320.2@2042.38,2857.96
D15: R1324.2 U300.M2 | length 1025.5
  SIG1 w4: U300.M2@2063.36,2973.71 2050.24,2973.71 2045.4,2968.87 2045.4,2961.19 2050.41,2956.18 2073.8,2956.18 2078.76,2951.22 2078.76,2924.78 ccw(c2090.81,2924.78) 2090.81,2912.73 2137.09,2912.73 cw(c2136.83,2907.9) 2136.82,2903.06 2120.15,2903.06 ccw(c2120.01,2898.26) 2120.02,2893.45 2145.48,2893.45 ccw(c2145.48,2898.39) 2150.42,2898.39 2150.42,2907.82 cw(c2155.42,2907.82) 2160.42,2907.82 2160.42,2898.39 ccw(c2165.2,2898.39) 2165.2,2893.61 ccw(c2165.2,2898.55) 2170.14,2898.55 2170.14,2905.02 cw(c2175.14,2905.02) 2180.14,2905.02 2180.14,2898.55 ccw(c2185.28,2898.55) 2185.28,2893.41 2194.69,2893.41 2197.08,2895.8 2197.39,2895.8 ccw(c2193.89,2899.3) 2197.39,2902.79 2182.51,2917.66 cw(c2186.05,2921.2) 2189.59,2924.73 2204.93,2909.39 ccw(c2207.8,2912.25) 2206,2908.62 ccw(c2207.8,2912.25) 2209.59,2908.62 ccw(c2207.8,2912.25) 2210.67,2909.39 2213.17,2911.89 2213.17,2924.21 ccw(c2208.13,2924.21) 2208.13,2929.25 2200.55,2929.25 cw(c2200.55,2934.25) 2200.55,2939.25 2210.69,2939.25 ccw(c2210.69,2942.17) 2212.75,2940.1 ccw(c2209.08,2943.78) 2214.27,2943.78 2220.37,2949.87 2220.37,2955.72 2213.81,2962.28 2213.81,2975.44 2219.86,2981.5 2219.86,2988.26 2213.61,2994.51 2213.61,3008.31 2219.86,3014.57 2219.86,3021.33 2213.61,3027.59 2213.61,3038.98 2219.86,3045.24 2219.86,3057.41 2224.57,3062.11 2229.13,3062.11 2232.85,3058.39 2232.85,3045.37 2224.85,3037.37 2224.85,3029.37 2232.85,3021.37 2232.85,3013.37 2224.85,3005.37 2224.85,2997.37 2232.85,2989.37 2232.85,2981.37 2224.85,2973.37 2224.85,2965.37 2232.85,2957.37 2232.85,2949.37 2224.85,2941.37 2224.85,2933.37 2232.85,2925.37 2232.85,2907.56 2226.25,2900.96 2217.03,2900.96 2199.96,2883.88 2122.12,2883.88 2113.9,2875.66 2110.17,2875.66 cw(c2110.17,2880.44) 2105.39,2880.44 2105.39,2898.09 ccw(c2099.76,2898.13) 2094.13,2898.09 2094.13,2880.71 2074,2860.58 R1324.2@2074,2857.96
D16: R1345.2 U300.D7 | length 1157.7
  SIG1 w6: U300.D7@1811.39,3131.19 v2(1827.14,3115.44)
  SIG6 w5.5: v2(1827.14,3115.44) 1827.14,3099.34 ccw(c1834.89,3099.34) 1829.4,3093.88 1835.75,3087.53 cw(c1830.73,3082.51) 1835.76,3077.51 1824.77,3066.51 ccw(c1833.29,3058.04) 1824.75,3049.59 1860.66,3013.67 ccw(c1866.18,3019.19) 1871.7,3024.7 1851.39,3045.01 1851.39,3089.13 cw(c1859.39,3089.13) 1867.39,3089.13 1867.39,3051.44 1875.96,3042.86 1888.97,3042.86 1898.76,3052.66 1898.76,3110.05 1909.32,3120.61 1923.57,3120.61 cw(c1923.57,3105.87) 1933.96,3116.32 1937.89,3112.4 cw(c1932.41,3106.92) 1937.91,3101.45 1926.91,3090.46 ccw(c1932.41,3085) 1926.9,3079.55 1950.43,3056.01 ccw(c1955.94,3061.47) 1961.4,3066.97 1948.83,3079.53 cw(c1954.33,3085) 1959.81,3090.48 1982.23,3068.05 cw(c1973.92,3059.81) 1985.63,3059.81 1985.63,3047.11 1943.54,3005.03 cw(c1938.04,3010.48) 1932.58,3015.99 1944.71,3028.12 ccw(c1939.34,3033.45) 1944.72,3038.77 1924.5,3059 ccw(c1918.48,3053.06) 1912.54,3047.04 1922.38,3037.19 cw(c1917.34,3032.2) 1922.37,3027.2 1905.48,3010.31 1905.48,2921.88 1916.41,2910.95 ccw(c1922.06,2916.61) 1927.72,2910.95 1939.9,2923.13 cw(c1945.39,2917.67) 1950.86,2912.17 1938.2,2899.52 ccw(c1944.03,2893.9) 1949.75,2888.17 1962.23,2900.64 cw(c1967.73,2895.18) 1973.19,2889.68 1960.84,2877.33 ccw(c1966.32,2871.85) 1960.84,2866.37 ; 1960.91,2866.45 1969.27,2858.09 v2@1979.46,2858.09
  other v2: 1978.92,2857.96
D17: R1347.2 U300.C7 | length 1536.3
  SIG1 w6: U300.C7@1779.9,3131.19 v2(1795.64,3115.44)
  SIG6 w5.5: v2(1795.64,3115.44) 1795.64,3056.8 1777.88,3039.04 1640.25,3039.04 1608.98,3070.31 1578.29,3070.31 1559.71,3088.88 1511.59,3088.88 1496.01,3073.3 1496.01,3016.53 1505.22,3007.32 1510.87,3007.32 ccw(c1510.87,3013.32) 1516.87,3013.32 cw(c1522.87,3013.32) 1522.87,3019.32 1540.69,3019.32 cw(c1540.69,3013.32) 1544.92,3017.58 1558.82,3003.68 ccw(c1563.05,3007.94) 1563.05,3001.94 1571.82,3001.94 cw(c1571.82,2995.94) 1571.82,2989.94 1561.59,2989.94 ccw(c1561.59,2983.94) 1561.59,2977.94 1583.82,2977.94 ccw(c1583.82,2983.94) 1589.82,2983.94 1589.82,3007.94 ccw(c1583.82,3007.94) 1583.82,3013.94 1568.02,3013.94 cw(c1568.02,3019.94) 1563.79,3015.68 1549.89,3029.58 ccw(c1545.67,3025.32) 1545.67,3031.32 1516.87,3031.32 cw(c1516.87,3037.32) 1510.87,3037.32 cw(c1516.87,3037.32) 1516.87,3043.32 1550.64,3043.32 cw(c1550.64,3037.32) 1554.86,3041.58 1568.76,3027.68 ccw(c1572.99,3031.94) 1572.99,3025.94 1583.82,3025.94 ccw(c1583.82,3031.94) 1589.82,3031.94 ccw(c1583.82,3031.94) 1583.82,3037.94 1577.96,3037.94 cw(c1577.96,3043.94) 1573.73,3039.68 1559.83,3053.58 ccw(c1555.61,3049.32) 1555.61,3055.32 1516.87,3055.32 cw(c1516.87,3061.32) 1510.87,3061.32 cw(c1516.87,3061.32) 1516.87,3067.32 1560.58,3067.32 cw(c1560.58,3061.32) 1564.8,3065.58 1578.7,3051.68 ccw(c1582.93,3055.94) 1582.93,3049.94 1595.82,3049.94 cw(c1595.82,3043.94) 1601.82,3043.94 1601.82,2995.94 ccw(c1607.82,2995.94) 1607.82,2989.94 1615.22,2989.94 1651.53,3026.25 1760.71,3026.25 1787.9,2999.06 1836.26,2999.06 1857.92,2977.4 1857.92,2935.64 1915.44,2878.11 v2@1915.44,2858.09
  other v2: 1915.89,2857.96
D18: R1349.2 U300.C8 | length 1156.9
  SIG1 w6: v2(1764.19,3115.4) v2(1764.19,3115.4) 1764.15,3146.94 U300.C8@1779.9,3162.69
  SIG6 w5.5: v2(1764.19,3115.4) 1779.94,3099.65 1779.94,3061.6 1770.44,3052.1 1651.77,3052.1 1648.12,3052.1 1640.5,3059.72 cw(c1644.74,3063.96) 1640.5,3068.21 1653.54,3081.24 ccw(c1649.29,3085.48) 1645.05,3089.73 1631.93,3076.6 cw(c1627.68,3080.85) 1623.44,3076.6 cw(c1627.68,3080.85) 1623.44,3085.09 1627.87,3089.52 ccw(c1623.63,3093.76) 1619.39,3098 1615.05,3093.66 cw(c1610.8,3097.91) 1606.56,3093.66 1605.15,3095.08 1593.22,3107 1507.6,3107 1480.16,3079.56 1480.16,3001.95 1490.64,2991.47 1528.49,2991.47 1558.57,2961.39 1603.36,2961.39 1655.55,3013.58 1752.74,3013.58 1785.48,2980.84 1835.76,2980.84 1843.8,2972.8 1843.8,2934.05 1884.27,2893.59 v2(1884.27,2857.96)
D19: R1351.2 U300.D8 | length 937.8
  SIG1 w6: v2(1795.64,3146.94) U300.D8@1811.39,3162.69
  SIG3 w5.5: v2(1732.65,3178.43) 1702.57,3178.43 1631.18,3107.04 ccw(c1636.47,3101.75) 1631.18,3096.46 1639.84,3087.8 cw(c1634.38,3082.3) 1628.88,3076.84 1620.22,3085.5 ccw(c1614.74,3080.02) 1609.26,3085.5 1604.51,3080.74 1604.51,3064.73 1624.11,3045.12 1643.81,3045.12 1673.28,3074.59 1673.28,3118.35 1685.52,3130.59 1751.23,3130.59 1767.57,3146.94 v2(1795.64,3146.94)
  SIG6 w4: v2(1947.51,2857.96) v2@1947.51,2863.83
  SIG6 w5.5: v2(1732.65,3178.43) 1780.46,3130.63 1801.68,3130.63 1811.39,3120.92 1811.39,3043.06 1869.89,2984.55 1869.89,2941.44 v2@1947.51,2863.83
D20: R1353.2 U300.E8 | length 1559.6
  SIG1 w6: v2(1827.14,3146.94) U300.E8@1842.89,3162.69
  SIG6 w5.5: v2@1826.63,3146.64 1841.95,3131.32 1896.53,3131.32 1910.88,3145.67 1910.88,3171.43 1932.04,3192.59 1989.74,3192.59 1996.57,3185.76 1996.57,3176.45 1986.84,3166.72 1944.82,3166.72 1935.71,3157.61 1935.71,3136.91 2022.23,3050.39 2022.23,3038.39 2014.36,3030.52 1991.39,3030.52 1968.83,3007.96 1968.83,2959.53 2008.16,2920.2 2008.16,2887.43 2016.35,2879.24 2033.54,2879.24 2041.3,2887 2041.3,2931.82 2080.29,2970.8 2156.32,2970.8 2178.16,2992.64 2262.12,2992.64 2269.57,2985.19 2269.57,2953.92 2259.87,2944.21 2249.93,2944.21 cw(c2249.93,2951.96) 2242.18,2951.96 2242.18,2966.22 ccw(c2234.43,2966.22) 2226.68,2966.22 2226.68,2950.37 cw(c2218.93,2950.37) 2211.18,2950.37 2211.18,2965.54 ccw(c2203.43,2965.54) 2195.68,2965.54 2195.68,2951.96 cw(c2187.93,2951.96) 2187.93,2944.21 2173.94,2944.21 2173.37,2943.65 2160.47,2930.74 cw(c2154.99,2936.22) 2149.51,2930.74 2142.63,2937.62 ccw(c2137.17,2932.12) 2131.67,2926.66 2139.27,2919.06 cw(c2133.81,2913.56) 2128.31,2908.1 2120.6,2915.81 ccw(c2115.14,2910.31) 2109.64,2904.85 2117.51,2896.97 cw(c2112.06,2891.47) 2106.55,2886.01 2098.63,2893.94 ccw(c2093.16,2888.44) 2087.66,2882.98 2094.71,2875.94 cw(c2089.23,2870.46) 2094.71,2864.98 2087.69,2857.96 v2(2010.76,2857.96)
D21: R1355.2 U300.A8 | length 1762.1
  SIG1 w6: v2(1701.16,3146.94) U300.A8@1716.9,3162.69
  SIG6 w5.5: v2(1694.54,2857.96) 1612.62,2939.87 1554.38,2939.87 1518.45,2975.81 1476.93,2975.81 1464.51,2988.22 1464.51,3079.57 1438.66,3105.42 cw(c1442.06,3109.26) 1438.43,3112.89 1439.87,3114.33 ccw(c1435.63,3118.57) 1431.38,3122.81 1427.76,3119.19 cw(c1423.52,3123.43) 1419.28,3127.68 1421.59,3130 ccw(c1417.35,3134.24) 1413.11,3138.48 1398.25,3123.63 cw(c1393.96,3127.97) 1387.86,3127.97 1387.86,3165.54 ccw(c1381.97,3165.51) 1376.09,3165.54 1376.09,3127.97 cw(c1370.09,3127.97) 1364.09,3127.97 1364.09,3148.94 ccw(c1358.09,3148.94) 1352.09,3148.94 1352.09,3133.32 cw(c1346.09,3133.32) 1340.09,3133.32 1340.09,3147.43 ccw(c1334.09,3147.43) 1334.09,3153.43 1311.12,3153.43 ccw(c1311.12,3147.43) 1311.12,3141.43 1321.58,3141.43 cw(c1321.58,3135.43) 1321.58,3129.43 1310.42,3129.43 ccw(c1310.42,3123.43) 1310.42,3117.43 1338.46,3117.43 cw(c1338.46,3111.43) 1338.46,3105.43 1311.39,3105.43 ccw(c1311.39,3099.43) 1311.39,3093.43 1318.72,3093.43 cw(c1318.72,3087.22) 1318.72,3081.02 1277.8,3081.02 cw(c1277.77,3087.48) 1277.8,3093.93 1288.32,3093.93 ccw(c1288.32,3099.93) 1288.32,3105.93 1275.47,3105.93 cw(c1275.47,3111.93) 1275.47,3117.93 1288.32,3117.93 ccw(c1288.32,3123.93) 1288.32,3129.93 1275.47,3129.93 cw(c1275.47,3135.93) 1275.47,3141.93 1288.32,3141.93 ccw(c1288.32,3147.93) 1288.32,3153.93 1280.62,3153.93 cw(c1280.62,3159.93) 1274.62,3159.93 1274.62,3165.77 1286.06,3177.22 cw(c1290.31,3172.97) 1296.31,3172.97 1296.31,3169.62 ccw(c1302.31,3169.62) 1308.31,3169.62 1308.31,3178.16 cw(c1314.31,3178.16) 1320.31,3178.16 1320.31,3169.62 ccw(c1326.31,3169.62) 1332.31,3169.62 1332.31,3178.34 cw(c1338.31,3178.34) 1344.31,3178.34 1344.31,3169.62 ccw(c1350.31,3169.62) 1356.31,3169.62 1356.31,3177.8 cw(c1362.31,3177.8) 1362.31,3183.8 1395.22,3183.8 1446.1,3132.91 1687.13,3132.91 v2(1701.16,3146.94)
D22: R1357.2 U300.B9 | length 1792.9
  SIG1 w6: v2(1732.65,3209.93) U300.B9@1748.4,3194.18
  SIG6 w5.5: v2(1662.91,2857.96) 1647.66,2873.22 1647.66,2888.05 1614.27,2921.44 1547.13,2921.44 1509.46,2959.11 1470.08,2959.11 1449.96,2979.23 1449.96,3080.32 1423.05,3107.23 1362.82,3107.23 1319.56,3063.96 1276.23,3063.96 1259.74,3080.45 1259.74,3171.42 1251.1,3180.06 1190.42,3180.06 1181.01,3189.48 1181.01,3203.04 cw(c1187.01,3203.04) 1193.01,3203.04 1193.01,3196.77 ccw(c1199.01,3196.77) 1205.01,3196.77 1205.01,3204.04 cw(c1211.01,3204.04) 1217.01,3204.04 1217.01,3196.77 ccw(c1223.01,3196.77) 1229.01,3196.77 1229.01,3204.04 cw(c1235.01,3204.04) 1241.01,3204.04 1241.01,3196.77 ccw(c1247.01,3196.77) 1253.01,3196.77 1253.01,3204.04 cw(c1259.01,3204.04) 1265.01,3204.04 1265.01,3191.96 ccw(c1271.01,3191.96) 1277.01,3191.96 1277.01,3204.04 cw(c1283.01,3204.04) 1289.01,3204.04 1289.01,3199.16 ccw(c1295.01,3199.16) 1301.01,3199.16 1301.01,3204.04 cw(c1307.01,3204.04) 1313.01,3204.04 1313.01,3199.68 ccw(c1319.01,3199.68) 1325.01,3199.68 1325.01,3204.04 cw(c1331.01,3204.04) 1337.01,3204.04 1337.01,3199.46 ccw(c1343.01,3199.46) 1349.01,3199.46 1349.01,3204.04 cw(c1355.01,3204.04) 1361.01,3204.04 1361.01,3200.08 ccw(c1367.01,3200.08) 1373.01,3200.08 1373.01,3205.47 cw(c1379.01,3205.47) 1379.01,3211.47 1385.52,3211.47 1449.96,3147.04 1550.19,3147.04 1552.19,3147.04 ccw(c1552.19,3153.04) 1558.19,3153.04 1558.19,3163.23 cw(c1564.19,3163.23) 1570.19,3163.23 1570.19,3149.15 ccw(c1576.19,3149.15) 1582.19,3149.15 1582.19,3163.23 cw(c1588.19,3163.23) 1594.19,3163.23 1594.19,3149.15 ccw(c1600.19,3149.15) 1606.19,3149.15 1606.19,3163.23 cw(c1612.19,3163.23) 1618.19,3163.23 1618.19,3149.15 ccw(c1624.19,3149.15) 1630.19,3149.15 1630.19,3163.23 cw(c1636.19,3163.23) 1642.19,3163.23 1642.19,3153.04 ccw(c1648.19,3153.04) 1648.19,3147.04 1661.96,3147.04 1669.76,3147.04 v2(1732.65,3209.93)
D23: R1359.2 U300.A9 | length 1757.9
  SIG1 w6: v2(1701.16,3209.93) U300.A9@1716.9,3194.18
  SIG6 w5.5: v2(1631.29,2857.96) 1631.29,2884.99 1610.83,2905.45 1540.85,2905.45 1502.24,2944.06 1459,2944.06 1435.07,2968 1435.07,2987.13 ccw(c1427.32,2987.13) 1427.32,2994.88 1398.79,2994.88 cw(c1398.79,3002.63) 1398.79,3010.38 1432.32,3010.38 ccw(c1432.32,3018.13) 1432.32,3025.88 1427.15,3025.88 cw(c1427.15,3033.63) 1427.15,3041.38 1427.32,3041.38 ccw(c1427.32,3049.13) 1435.07,3049.13 1435.07,3077.25 1420.4,3091.92 1364.33,3091.92 1315.82,3043.41 1280.42,3043.41 1259.16,3064.67 ccw(c1253.68,3059.19) 1248.2,3064.67 1239.98,3056.46 cw(c1234.52,3061.96) 1229.02,3067.42 1237.23,3075.63 ccw(c1231.75,3081.11) 1237.23,3086.59 1224.12,3099.71 1210.99,3099.71 ccw(c1210.99,3091.96) 1203.24,3091.96 1203.24,3085.56 cw(c1195.49,3085.56) 1187.74,3085.56 1187.74,3094.69 ccw(c1179.99,3094.69) 1172.24,3094.69 1172.24,3085.56 cw(c1164.49,3085.56) 1156.74,3085.56 1156.74,3091.96 ccw(c1148.99,3091.96) 1148.99,3099.71 1143.17,3099.71 1136.12,3106.76 1136.12,3122.23 1136.12,3126.12 ccw(c1122.89,3126.12) 1132.27,3135.46 1101.5,3166.22 cw(c1106.98,3171.7) 1112.46,3177.18 1125.26,3164.39 ccw(c1130.74,3169.87) 1136.22,3164.39 ccw(c1130.74,3169.87) 1136.22,3175.35 1121.1,3190.47 cw(c1126.58,3195.95) 1121.1,3201.43 cw(c1126.58,3195.95) 1132.06,3201.43 1132.29,3201.19 ccw(c1137.77,3206.67) 1143.25,3201.19 1158.92,3216.86 1162.72,3220.66 1402.92,3220.66 1460.24,3163.34 1537.76,3163.34 1557.1,3182.68 1673.9,3182.68 v2(1701.16,3209.93)
D24: R1302.2 U300.C2 | length 1541.4
  SIG1 w4: R1302.2@1552.04,2860.81 1552.04,2869.7 cw(c1569.57,2869.7) 1557.18,2882.09 ccw(c1544.13,2895.14) 1562.58,2895.14 1562.58,2949.97 ccw(c1556.82,2949.97) 1556.82,2955.73 1539.06,2955.73 cw(c1539.06,2961.73) 1539.06,2967.73 1556.8,2967.73 ccw(c1556.8,2973.73) 1556.8,2979.73 1527.28,2979.73 cw(c1527.28,2985.73) 1527.28,2991.73 1556.8,2991.73 ccw(c1556.8,2997.73) 1556.8,3003.73 1515.67,3003.73 cw(c1515.67,3009.73) 1515.67,3015.73 1556.31,3015.73 ccw(c1556.31,3021.73) 1562.31,3021.73 ; 1562.31,3021.5 1562.31,3022.16 cw(c1568.22,3022.16) 1574.12,3022.16 1574.12,2917.54 ccw(c1580.24,2917.54) 1586.36,2917.54 1586.36,3021.45 cw(c1592.36,3021.45) 1598.36,3021.45 1598.36,2916.12 ccw(c1604.36,2916.12) 1610.36,2916.12 1610.36,2972.23 cw(c1616.37,2972.23) 1622.38,2972.23 1622.38,2902.88 ccw(c1628.38,2902.88) 1634.38,2902.88 1634.38,2971.23 cw(c1640.38,2971.23) 1646.38,2971.23 1646.38,2902.88 ccw(c1652.38,2902.88) 1658.38,2902.88 1658.38,2971.37 cw(c1664.38,2971.37) 1670.38,2971.37 1670.38,2902.88 ccw(c1676.38,2902.88) 1682.38,2902.88 1682.38,2948.64 cw(c1688.37,2948.64) 1694.36,2948.64 1694.36,2935.98 ccw(c1712.45,2935.98) 1712.45,2917.89 1740.19,2917.89 ccw(c1740.19,2940.08) 1755.89,2924.39 ccw(c1736.83,2943.45) 1763.78,2943.45 1763.78,2978.48 cw(c1775.94,2978.48) 1775.94,2990.64 1780.85,2990.64 cw(c1780.85,2982.41) 1789.08,2982.41 cw(c1780.38,2982.41) 1780.38,2973.71 U300.C2@1779.9,2973.71
D25: R1305.2 U300.A1 | length 1805.8
  SIG1 w4: R1305.2@1552.04,2798.51 1551.43,2798.51 1528.73,2775.8 1528.73,2751.27 ccw(c1534.73,2751.27) 1534.73,2745.27 1556.77,2745.27 cw(c1556.77,2739.27) 1556.77,2733.27 1534.73,2733.27 ccw(c1534.73,2727.27) 1528.73,2727.27 1528.73,2695.54 cw(c1520.29,2696.48) 1511.8,2696.48 1511.8,2872.15 1506.04,2877.91 1506.04,2952.84 1501.37,2957.51 1501.37,2971.69 1440.51,3032.55 1440.51,3047.33 1423.76,3064.08 1423.76,3084.56 1418.12,3090.19 1355.24,3090.19 1349.99,3084.94 1349.99,3070.93 1339.77,3060.72 1339.77,3031.74 1331.09,3023.06 1331.09,3006.51 cw(c1325.23,3006.49) 1319.36,3006.51 1319.36,3072.55 cw(c1325.36,3072.55) 1325.36,3078.55 1335.84,3078.55 ccw(c1335.84,3084.55) 1335.84,3090.55 1325.36,3090.55 cw(c1325.36,3096.55) 1319.36,3096.55 cw(c1325.32,3096.59) 1325.32,3102.55 1376.14,3102.55 ccw(c1376.14,3108.55) 1376.14,3114.54 1327.4,3114.54 cw(c1327.4,3120.54) 1327.4,3126.54 1372.41,3126.54 ccw(c1372.41,3132.54) 1372.41,3138.54 1330,3138.54 cw(c1330,3144.54) 1330,3150.54 1387.52,3150.54 cw(c1387.52,3145.08) 1392.98,3145.08 1392.98,3108.5 ccw(c1399.62,3108.5) 1399.62,3101.86 ccw(c1399.62,3107.86) 1405.62,3107.86 1405.62,3127.32 cw(c1411.46,3127.29) 1417.31,3127.32 ccw(c1423.95,3127.32) 1423.95,3120.67 1555.95,3120.67 cw(c1555.95,3104.25) 1567.38,3092.46 ccw(c1574.09,3085.65) 1567.33,3078.89 1577.94,3068.27 ccw(c1586.44,3076.77) 1595.35,3068.72 cw(c1604.54,3059.53) 1604.54,3072.52 1605.57,3072.52 cw(c1605.57,3056.35) 1621.74,3056.35 1621.74,3008.09 ccw(c1630.18,3008.09) 1630.18,2999.64 1658.83,2999.64 cw(c1658.83,2967.18) 1681.78,2990.14 1710.74,2961.18 cw(c1694.94,2945.38) 1717.12,2942.66 U300.A1@1716.9,2942.21
D26: R1306.2 U300.B1 | length 1800.5
  SIG1 w4: 1446.94,3092.53 ccw(c1440.83,3092.53) 1440.83,3098.64 1422.88,3098.64 cw(c1422.88,3104.87) 1422.88,3111.09 1450.71,3111.09 cw(c1450.71,3102.73) 1459.06,3102.73 1459.06,3093.09 ccw(c1465.06,3093.09) 1471.06,3093.09 1471.06,3106.36 cw(c1477.06,3106.36) 1483.06,3106.36 1483.06,3093.09 ccw(c1489.06,3093.09) 1495.06,3093.09 1495.06,3106.14 cw(c1501.06,3106.14) 1507.06,3106.14 ; 1447.06,3092.53 1447.06,3083.85 ccw(c1452.31,3083.85) 1452.31,3078.6 1492.42,3078.6 cw(c1492.42,3072.6) 1492.42,3066.6 1446.68,3066.6 ccw(c1446.68,3060.6) 1446.68,3054.6 1492.57,3054.6 cw(c1492.57,3048.6) 1492.57,3042.6 1459.66,3042.6 ccw(c1459.66,3036.6) 1459.66,3030.6 1491.58,3030.6 cw(c1491.58,3024.6) 1491.58,3018.6 1482.71,3018.6 ccw(c1482.71,3012.6) 1482.71,3006.6 1493.61,3006.6 1511.8,2988.42 1511.8,2966.29 1519.94,2958.15 1519.94,2944.67 ccw(c1523.33,2944.67) 1523.33,2941.27 1546.92,2941.27 cw(c1546.88,2934.68) 1546.92,2928.09 1523.33,2928.09 ccw(c1523.31,2922.05) 1523.33,2916.01 1547.92,2916.01 cw(c1547.92,2910.01) 1547.92,2904.01 1523.36,2904.01 ccw(c1523.36,2898.01) 1523.36,2892.01 1542.17,2892.01 cw(c1542.17,2886.01) 1542.17,2880.01 1526.7,2880.01 ccw(c1526.7,2874.16) 1520.84,2874.16 1520.84,2797.89 ccw(c1527.92,2797.92) 1534.99,2797.89 1534.99,2812.61 R1306.2@1552.04,2829.66 ; 1507.27,3106.1 1507.27,3032.24 ccw(c1513.27,3032.24) 1519.27,3032.24 1519.27,3104.75 cw(c1525.27,3104.75) 1531.27,3104.75 1531.27,3031.84 ccw(c1537.27,3031.84) 1543.27,3031.84 1543.27,3105.32 cw(c1549.27,3105.32) 1555.27,3105.32 1555.27,3042.57 ccw(c1561.57,3042.57) 1561.57,3036.28 1567.55,3036.28 ccw(c1567.55,3042.86) 1574.13,3042.86 1574.13,3051.38 cw(c1579.95,3051.38) 1585.77,3051.38 1585.77,3041.38 ccw(c1591.59,3041.38) 1597.41,3041.38 1597.41,3056.54 cw(c1603.41,3056.54) 1609.41,3056.54 1609.41,3000.4 ccw(c1620.72,3000.4) 1620.72,2989.09 1659.64,2989.09 cw(c1659.64,2964.81) 1676.81,2981.98 1698.43,2960.36 cw(c1686.52,2948.45) 1703.36,2948.45 1703.36,2938.21 ccw(c1713.44,2938.21) 1713.44,2928.12 1731.12,2928.12 ccw(c1731.12,2943.67) 1742.12,2932.68 1748.4,2938.96 U300.B1@1748.4,2942.21
D27: R1307.2 U300.A2 | length 1805.1
  SIG1 w4: 1501.29,2865.7 1493.95,2873.05 1493.95,2942.63 1482.93,2953.65 1482.93,2971.2 1425.59,3028.54 1425.59,3047.26 1417.37,3055.48 1355.36,3055.48 1350.45,3050.57 1350.45,3027.76 1339.49,3016.8 1339.49,2992.29 1335.91,2988.7 1321.17,2988.7 1309.82,3000.06 1309.82,3147.4 1323.75,3161.33 1402.77,3161.33 1404.45,3159.65 cw(c1400.22,3155.42) 1404.45,3151.18 ccw(c1408.87,3146.78) 1413.28,3142.35 cw(c1417.23,3139.62) 1420.63,3143.02 1433.1,3130.54 1568.04,3130.54 1574.03,3124.55 ccw(c1577.68,3128.2) 1581.33,3124.55 1586.66,3129.88 cw(c1591.05,3125.48) 1595.46,3121.08 1590.89,3116.51 ccw(c1595.3,3112.1) 1590.89,3107.69 1611.99,3086.59 ccw(c1616.31,3090.91) 1620.63,3086.59 1631.45,3097.4 cw(c1635.84,3093) 1640.25,3088.6 1629.43,3077.79 ccw(c1633.75,3073.47) 1629.43,3069.15 1634.55,3064.03 1634.55,3055.34 1645,3044.89 cw(c1640.75,3040.65) 1645,3036.41 1631.42,3022.83 ccw(c1635.66,3018.59) 1639.9,3014.35 1656.89,3031.33 cw(c1661.13,3027.09) 1665.38,3022.85 1661.76,3019.23 ccw(c1666,3014.99) 1661.76,3010.75 ccw(c1666,3014.99) 1670.25,3010.75 cw(c1674.59,3006.8) 1678.74,3010.95 ccw(c1682.55,3014.76) 1682.55,3009.38 ccw(c1682.55,3015.49) 1686.87,3011.17 1696.04,3020.34 cw(c1700.44,3015.93) 1704.84,3011.54 1695.67,3002.37 ccw(c1699.74,2998.29) 1695.67,2994.22 U300.A2@1716.18,2973.71 ; 1501.29,2865.78 1501.23,2689.3 ccw(c1507.23,2689.3) 1508.7,2683.48 cw(c1508.7,2677.48) 1508.7,2671.48 1507.17,2671.48 ccw(c1507.17,2665.48) 1501.17,2665.48 ccw(c1507.17,2665.48) 1507.17,2659.48 1508.69,2659.48 cw(c1508.69,2653.48) 1508.69,2647.48 1507.16,2647.48 ccw(c1507.16,2641.48) 1501.16,2641.48 ccw(c1507.16,2641.48) 1507.16,2635.48 1508.68,2635.48 cw(c1508.68,2629.48) 1508.68,2623.48 1507.15,2623.48 ccw(c1507.15,2617.48) 1501.15,2617.48 ccw(c1507.15,2617.48) 1507.15,2611.48 1508.67,2611.48 cw(c1508.67,2605.48) 1508.67,2599.48 1507.14,2599.48 ccw(c1507.14,2593.48) 1501.14,2593.48 ccw(c1507.14,2593.48) 1507.14,2587.48 1513.59,2587.48 cw(c1513.57,2581.48) 1513.59,2575.48 1507.13,2575.48 ccw(c1507.13,2569.48) 1507.13,2563.48 1517.19,2563.48 1527.46,2573.75 1527.46,2593.89 1524.01,2597.34 1524.01,2633.41 1524.01,2677.02 R1307.2@1552.04,2705.06
D28: R1314.2 U300.D2 | length 1871.1
  SIG1 w4: 1470.3,2913.53 1470.3,2862.37 1481.17,2851.49 1481.17,2330.25 ; 1470.48,2913.71 1460.35,2923.84 1460.35,2943.24 1419.52,2984.08 1354.61,2984.08 1350.46,2979.93 1350.46,2969.53 1344.77,2963.84 1320.82,2963.84 1292.5,2992.16 1292.5,3157.91 1317.89,3183.3 1409.19,3183.3 1442.99,3149.49 1612.83,3149.49 1662.53,3099.79 1662.53,3063.69 1684.08,3042.14 1762.03,3042.14 1797.37,3006.8 1797.37,2987.73 U300.D2@1811.39,2973.71 ; 1481.48,2330.25 ccw(c1487.15,2330.25) 1487.15,2324.59 1519.37,2324.59 cw(c1519.37,2318.59) 1519.37,2312.59 1491.22,2312.59 ccw(c1491.22,2306.59) 1491.22,2300.59 1524.4,2300.59 cw(c1524.4,2294.59) 1524.4,2288.59 1516.17,2288.59 ccw(c1516.15,2282.59) 1516.17,2276.59 1546.33,2276.59 R1314.2@1552.04,2270.87
D29: R1316.2 U300.C3 | length 1618.4
  SIG1 w4: 1481.41,2927.07 1472,2936.48 1472,2964.88 1417.03,3019.85 1355.97,3019.85 1348.96,3012.83 1348.96,2989.64 1336.41,2977.09 1320.74,2977.09 1301.21,2996.63 1301.21,3152.93 1321.07,3172.79 1404.96,3172.79 1438.06,3139.69 1609.66,3139.69 1651.19,3098.16 1651.19,3056.42 1677.61,3030 1755.1,3030 U300.C3@1779.9,3005.21 ; 1481.58,2927.24 1481.58,2868.01 1491.42,2858.17 1491.42,2398.77 1507.05,2383.13 1536.12,2383.13 R1316.2@1552.33,2399.35
D30: R1322.2 U300.E2 | length 1817
  SIG1 w4: 1446.92,2884.51 1446.92,2848.59 1460.68,2834.82 1460.68,2297.97 R1322.2@1552.04,2206.64 ; 1446.92,2884.52 1419.36,2912.08 1346.54,2912.08 1274.85,2983.77 1274.85,3167.64 1310.53,3203.33 1420.4,3203.33 1454.79,3168.94 1619.06,3168.94 1692.47,3095.53 1756.54,3095.53 1773.91,3078.16 1773.91,3063.19 1826.24,3010.85 1826.24,2990.13 U300.E2@1842.61,2973.75
D31: R1325.2 U300.D3 | length 1739.9
  SIG1 w4: 1458.2,2902.52 1458.2,2856.83 1470.93,2844.1 1470.93,2307 1539.17,2238.76 R1325.2@1552.04,2238.76 ; 1458.38,2902.69 1446.24,2914.83 1446.24,2930.08 1427.75,2948.57 1323.52,2948.57 1283.99,2988.11 1283.99,3163.25 1314.51,3193.76 1415.03,3193.76 1450.57,3158.22 1616.45,3158.22 1674.6,3100.07 1674.6,3069.84 1688.29,3056.15 1760.45,3056.15 U300.D3@1811.39,3005.21